# EAGLE board Lamp_dispatcher (EAGLE 7.3.0)
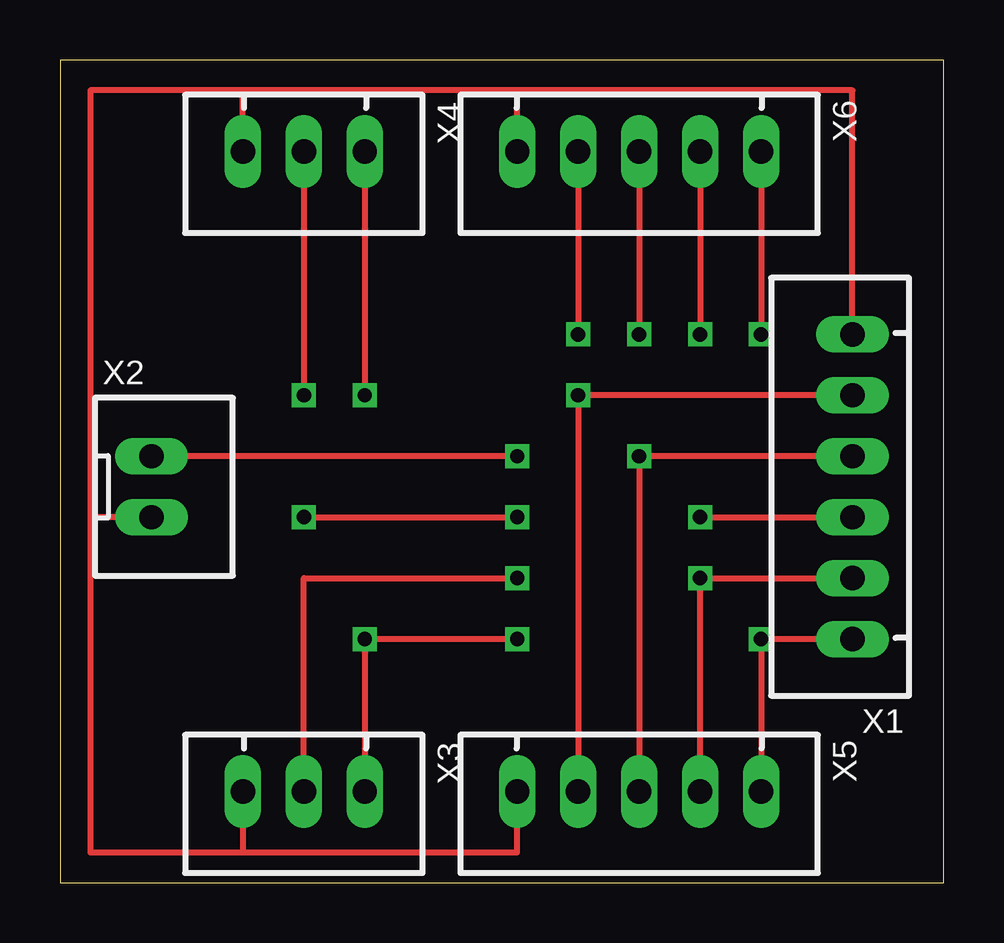
[diagram p0: board, top side]
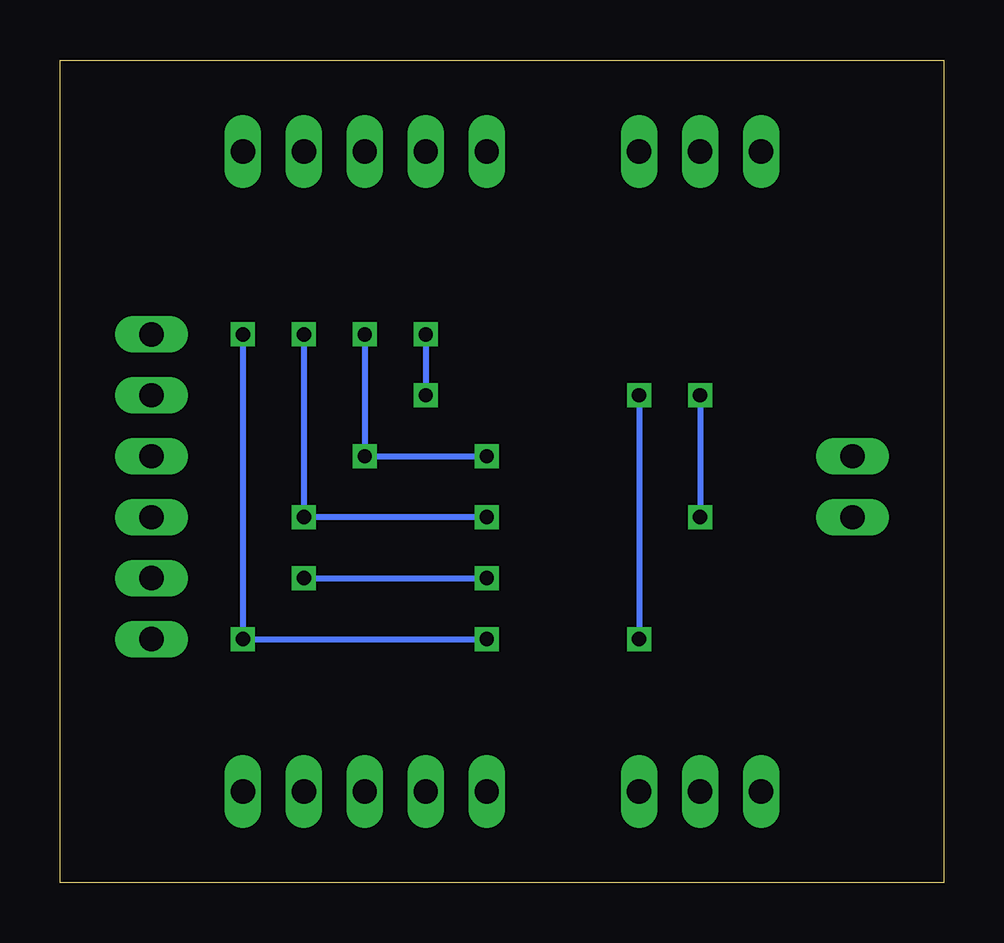
[diagram p1: board, bottom side, seen from below]

Size 36.83 x 34.29 mm. Coordinates in mm from the lower left corner, seen from the top.
Outline: 0,0 36.83,0 36.83,34.29 0,34.29 0,0
Copper layers (1*16): Top 0.035mm / dielectric 1.5mm / Bottom 0.035mm
Design rules "default": minimum track width 10mil, minimum drill 24mil, track to track 8mil, track to pad 8mil, pad to pad 8mil, via to via 8mil, smd to smd 8mil, copper to edge 40mil, drill to drill 8mil, minimum pad ring 10mil, minimum via ring 8mil, stop-mask expansion 4mil, vias tented up to drill 0mil, thermal gap 10mil

## Footprints (pad centres in the part's own frame; a part is rotated, then mirrored left to right if it is on the bottom)
JST-XH-06-PACKAGE-LONG-PAD = drill 1.016 long: 1 -6.35,0; 2 -3.81,0; 3 -1.27,0; 4 1.27,0; 5 3.81,0; 6 6.35,0
JST-XH-02-PACKAGE-LONG-PAD = drill 1.016 long: 1 -1.27,0; 2 1.27,0
JST-XH-03-PACKAGE-LONG-PAD = drill 1.016 long: 1 -2.54,0; 2 0,0; 3 2.54,0
JST-XH-05-PACKAGE-LONG-PAD = drill 1.016 long: 1 -5.08,0; 2 -2.54,0; 3 0,0; 4 2.54,0; 5 5.08,0

## Placement (x,y rotation side)
X1  JST-XH-06-PIN-LONG-PAD  [JST-XH-06-PACKAGE-LONG-PAD]  33.02,16.51 90 top
X2  JST-XH-02-PIN-LONG-PAD  [JST-XH-02-PACKAGE-LONG-PAD]  3.81,16.51 270 top
X3  JST-XH-03-PIN-LONG-PAD  [JST-XH-03-PACKAGE-LONG-PAD]  10.16,3.81 180 top
X4  JST-XH-03-PIN-LONG-PAD  [JST-XH-03-PACKAGE-LONG-PAD]  10.16,30.48 180 top
X5  JST-XH-05-PIN-LONG-PAD  [JST-XH-05-PACKAGE-LONG-PAD]  24.13,3.81 180 top
X6  JST-XH-05-PIN-LONG-PAD  [JST-XH-05-PACKAGE-LONG-PAD]  24.13,30.48 180 top

## Library data of the parts
X1-X6 = Rembrandt Electronics - JST XH Connectors v1-0

## Nets
API_BRAKE: X1.4 X2.1 X5.3 X6.3
API_START_ENGINE: X1.1 X3.1 X4.1 X5.1 X6.1
API_TURN_LEFT: X1.2 X3.2 X5.2
API_TURN_RIGHT: X1.3 X4.2 X6.2
API_WITHDRAW: X1.5 X5.4 X6.4
GND: X1.6 X2.2 X3.3 X4.3 X5.5 X6.5

## Tracks (layer width: path | path; a pad name or v marks a point on that pad's centre or on a via)
API_BRAKE  (via drill 0.6)
  Top 0.254: X6.3 v24.13,22.86 | X5.3 v24.13,17.78 X1.4 | v19.05,17.78 X2.1
  Bottom 0.254: v24.13,22.86 v24.13,17.78 v19.05,17.78
API_START_ENGINE  (via drill 0.6)
  Top 0.254: X5.1 v29.21,10.16 X1.1 | X4.1 v12.7,20.32 | X3.1 v12.7,10.16 v19.05,10.16 | X6.1 v29.21,22.86
  Bottom 0.254: v12.7,20.32 v12.7,10.16 | v29.21,22.86 v29.21,10.16 v19.05,10.16
API_TURN_LEFT  (via drill 0.6)
  Top 0.254: X5.2 v26.67,12.7 X1.2 | X3.2 10.16,12.7 v19.05,12.7
  Bottom 0.254: v26.67,12.7 v19.05,12.7
API_TURN_RIGHT  (via drill 0.6)
  Top 0.254: X6.2 v26.67,22.86 | v26.67,15.24 X1.3 | X4.2 v10.16,20.32 | v10.16,15.24 v19.05,15.24
  Bottom 0.254: v26.67,22.86 v26.67,15.24 v19.05,15.24 | v10.16,20.32 v10.16,15.24
API_WITHDRAW  (via drill 0.6)
  Top 0.254: X6.4 v21.59,22.86 | X5.4 v21.59,20.32 X1.5
  Bottom 0.254: v21.59,22.86 v21.59,20.32
GND
  Top 0.254: X1.6 33.02,33.02 19.05,33.02 | 19.05,33.02 7.62,33.02 | 7.62,33.02 1.27,33.02 1.27,15.24 | 1.27,15.24 1.27,1.27 7.62,1.27 | 7.62,1.27 19.05,1.27 X5.5 | X3.3 7.62,1.27 | X2.2 1.27,15.24 | X4.3 7.62,33.02 | X6.5 19.05,33.02